# Altium PCB ValenFanControllerv01.PcbDoc
Units mm, origin at the board's own origin, x right, y up, seen from the top; angles counter-clockwise.
Board outline 175 x 100 mm, 2 copper layers (Top Layer, Bottom Layer); 106 components, 79 nets, 435 pads, 399 vias.
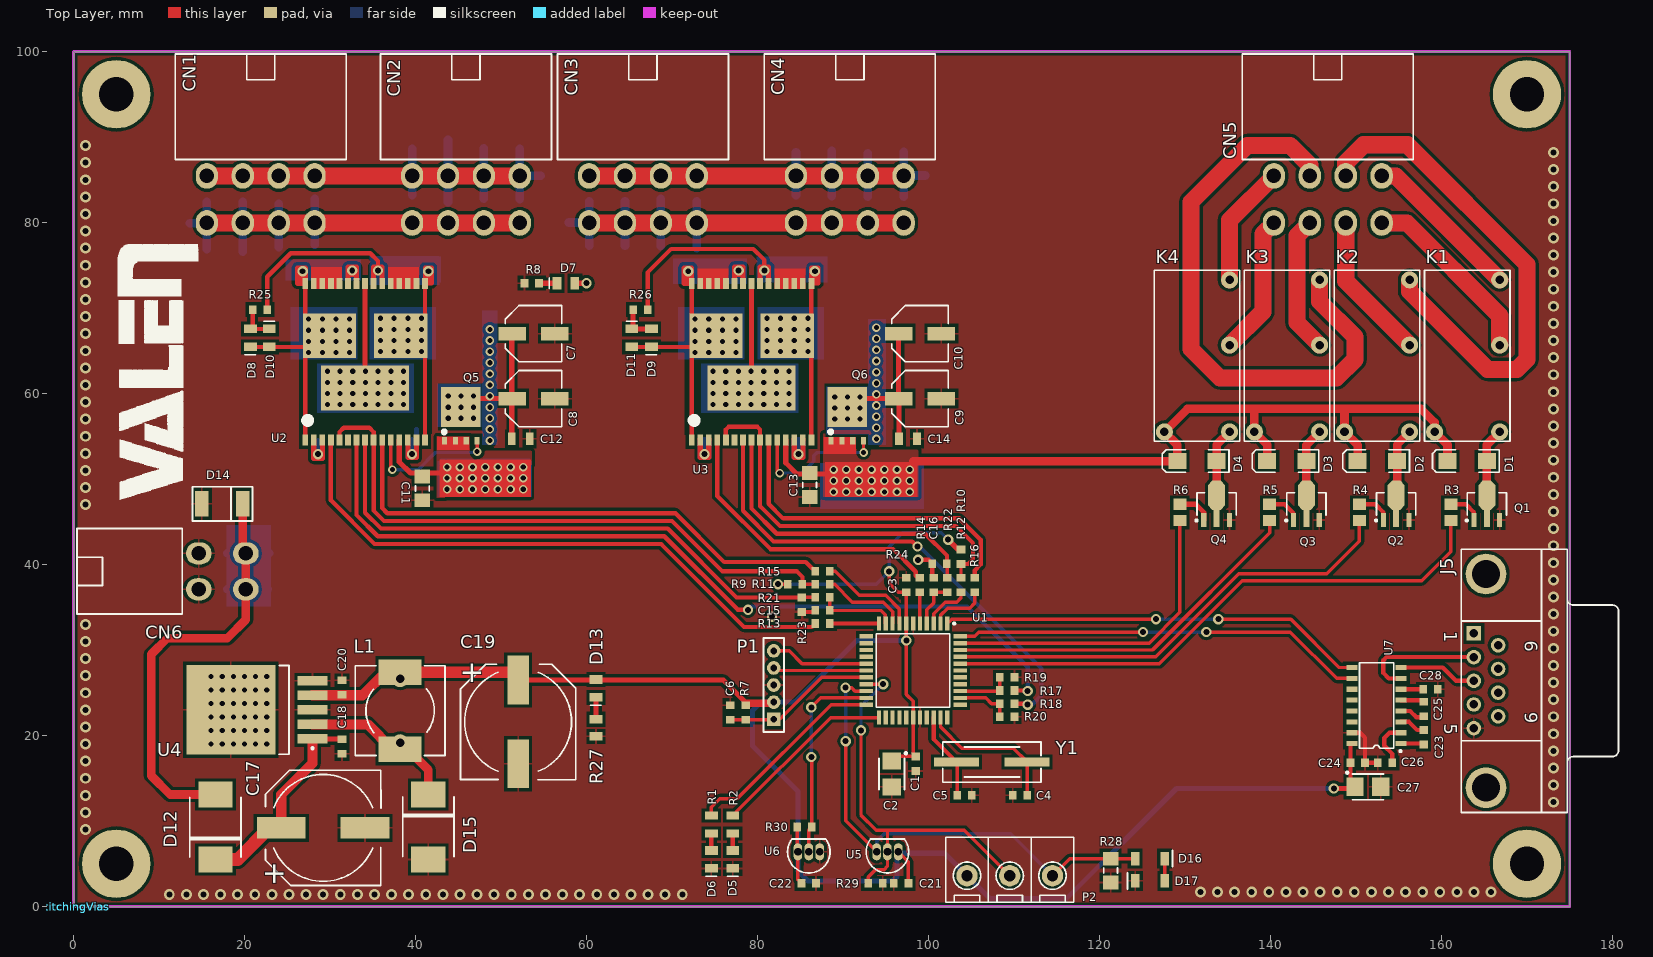
[diagram p0: Top Layer view]
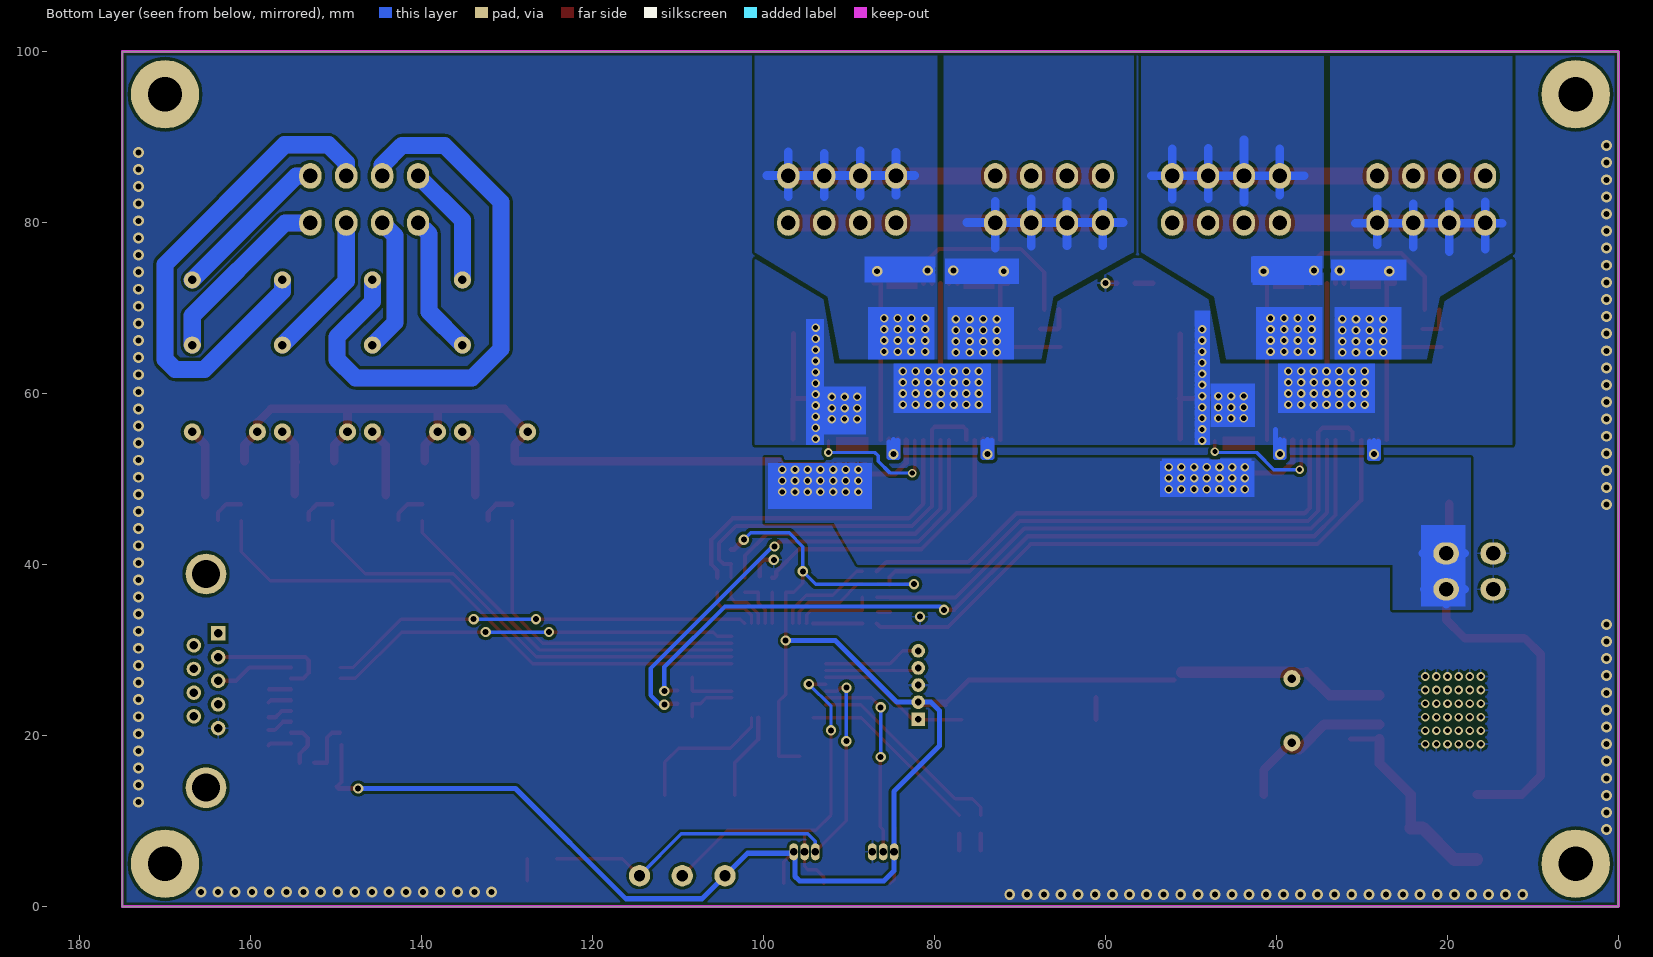
[diagram p1: Bottom Layer view, seen from below]
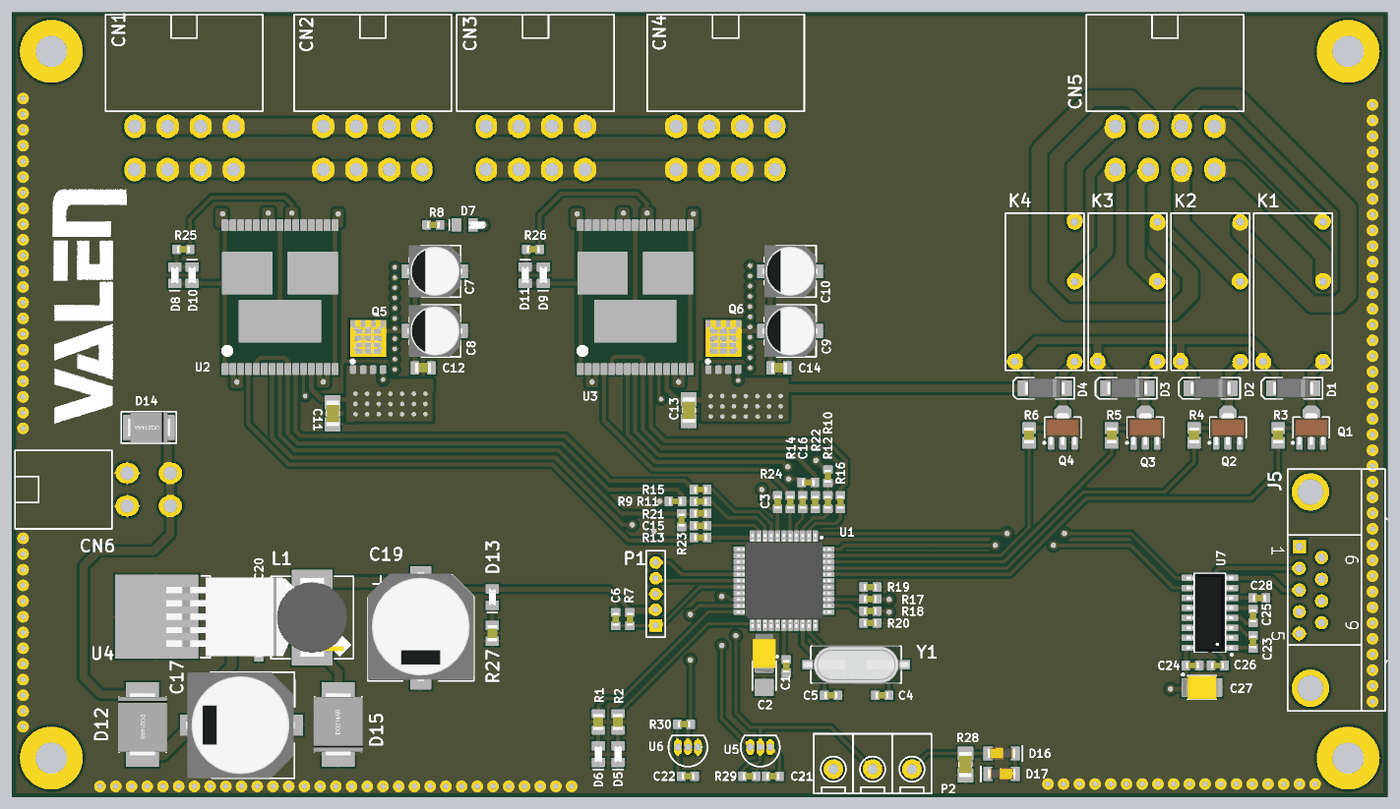
[diagram p2: 3D render of the assembled board from above, using the file's embedded part models]

## Layer stack, top to bottom
Top Layer: signal copper 0.0356
Dielectric: dielectric 0.32, FR-4, Dk 4.8
Bottom Layer: signal copper 0.0356

## Board outline
0,0 175,0 175,100 0,100

## Design rules (kind name [scope] priority, off if disabled: settings)
Clearance StitchingVias-Internal [InComponent('StitchingVias') vs InComponent('StitchingVias')] p1: gap=0.8 // Clearance between Stitching Vias
Clearance StitchingVias-Electrical [InComponent('StitchingVias') vs OnSignal] p2: gap=0.5 // Clearance between Stitching Vias and Electrical Objects
Clearance StitchingVias-Board [InComponent('StitchingVias') vs OnLayer('Keep-Out Layer')] p3: gap=0.5 // Clearance between Stitching Vias and Board Outline
Clearance [All] p4: gap=0.3
ComponentClearance StitchingVias-Comp [InComponent('StitchingVias')] p1: gap=0 collisioncheckmode=3 verticalgap=0 showdistances=FALSE // Clearance between "StitchingVias" Component and other Components
ComponentClearance [All] p2: gap=0.254 collisioncheckmode=3 verticalgap=0.254 showdistances=FALSE
HoleToHoleClearance [All] p1: gap=0.1 allowstackedmicrovias=TRUE
MinimumSolderMaskSliver [All] p1: minsoldermaskwidth=0.1
PasteMaskExpansion [All] p1: expansion=0.1
PlaneConnect StitchingVias-Plane [InComponent('StitchingVias')] p1: planeconnectstyle=Direct reliefexpansion=0.508 reliefentries=4 reliefconductorwidth=0.254 reliefairgap=0.254 // Power plane connect style rule for Stitching Vias
PlaneConnect [All] p2: planeconnectstyle=Relief reliefexpansion=0.508 reliefentries=4 reliefconductorwidth=0.3 reliefairgap=0.254
PolygonConnect StitchingVias-Poly [InComponent('StitchingVias')] p1: connectstyle=Direct reliefconductorwidth=0.254 reliefentries=4 polygonreliefangle="90 Angle" // Polygon connect style rule for Stitching Vias
PolygonConnect [All] p2: connectstyle=Relief reliefconductorwidth=0.254 reliefentries=4 polygonreliefangle="90 Angle"
RoutingVias StitchingVias-ViaStyle [InComponent('StitchingVias')] p1: holewidth=1 width=2 viastyle="Through Hole" minholewidth=1 minwidth=2 maxholewidth=1 maxwidth=2 // Via style rule for Stitching Vias
RoutingVias [All] p2: holewidth=0.6 width=1 viastyle="Through Hole" minholewidth=0.6 minwidth=0.8 maxholewidth=1.2 maxwidth=2
SilkscreenOverComponentPads [All] p1: minsilkscreentomaskgap=0.05
SolderMaskExpansion [All] p1: expansion=0.1
TestPointUsage [All] p1: valid=0 allowmultiple=FALSE
Testpoint [All] p1: side=15 testpointundercomponent=TRUE minsize=1.016 maxsize=2.54 preferedsize=1.524 minholesize=0 maxholesize=1.016 preferedholesize=0.813 testpointgrid=0.025 style=1023 order=0123456789
Width [All] p1: maxlimit=5 minlimit=0.3 preferedwidth=0.3
18 further rules are at their usual default settings.

## Classes and differential pairs
component class USART: C23 C24 C25 C26 C27 C28 J5 U7
component class MotorController: C7 C8 C9 C10 C11 C12 C13 C14 C15 C16 D7 D8 D9 D10 D11 Q5 Q6 R8 R9 R10 R11 R12 R13 R14 R15 R16 R17 R18 R19 R20 R21 R22 R23 R24 R25 R26 U2 U3
component class Sensor: C21 C22 D16 D17 P2 R28 R29 R30 U5 U6
component class POWER: C17 C18 C19 C20 D12 D13 D14 D15 L1 R27 U4
component class Main: C1 C2 C3 C4 C5 C6 P1 R7 U1 Y1
component class IO: D1 D2 D3 D4 D5 D6 D18 D19 K1 K2 K3 K4 K5 K6 K7 K8 K9 K10 K11 K12 K13 Q1 Q2 Q3 Q4 Q7 Q8 Q9 Q10 Q11 Q12 Q13 R1 R2 R3 R4 R5 R6
component class Connectors: CN1 CN2 CN3 CN4 CN5 CN6 CN7

## Components (designator, comment, footprint, x,y, rotation, side; value= is the part's Value field where it differs from the comment)
C1 "Cap" 3-0603_L 98.5,16.7 r90 top
C2 "CAP-Tantal" 3528 95.7,15.5 r270 top
C3 "Cap" 3-0603_L 97.4,37.6 r270 top
C4 "Cap" 3-0603_L 110.7,13 r0 top
C5 "Cap" 3-0603_L 104.2,13 r180 top
C6 "Cap" 3-0603_L 76.8,22.7 r270 top
C7 "Cap Pol1" "CAP D Size" 53.8,67 r90 top
C8 "Cap Pol1" "CAP D Size" 53.8,59.4 r90 top
C9 "Cap Pol1" "CAP D Size" 99,59.4 r90 top
C10 "Cap Pol1" "CAP D Size" 99,67 r90 top
C11 "Cap" 8-1206 40.8,48.9 r90 top
C12 "Cap" "6-0805 - big" 52.3,54.7 r180 top
C13 "Cap" 8-1206 86.1,49.3 r90 top
C14 "Cap" "6-0805 - big" 97.6,54.7 r180 top
C15 "Cap" 3-0603_L 87.6,34.625 r0 top
C16 "Cap" 3-0603_L 100.6,37.6 r270 top
C17 "Cap Pol1" "CAP Size H13= 12.5x13.8mm" 29.2,9.2 r90 top
C18 "Cap" 3-0603_L 31.4,18.7 r90 top
C19 "Cap Pol1" "CAP Size H13= 12.5x13.8mm" 52,21.6 r0 top
C20 "Cap" 3-0603_L 31.4,25.6 r270 top
C21 "Cap" 3-0603_L 96.8,2.7 r0 top
C22 "Cap" 3-0603_L 86,2.7 r180 top
C23 "Cap" 3-0603_L 157.9,19.8 r90 top
C24 "Cap" 3-0603_L 150.2,16.8 r180 top
C25 "Cap" 3-0603_L 157.9,23.1 r90 top
C26 "Cap" 3-0603_L 153.4,16.8 r180 top
C27 "CAP-Tantal" 3528 151.4,14 r0 top
C28 "Cap" 3-0603_L 158.7,25.4 r0 top
CN1 "Connector 4973-08TRNLF" "Connector 4973-08TRNLF" 21.9,82.7 r180 top
CN2 "Connector 4973-08TRNLF" "Connector 4973-08TRNLF" 45.9,82.7 r180 top
CN3 "Connector 4973-08TRNLF" "Connector 4973-08TRNLF" 66.6,82.7 r180 top
CN4 "Connector 4973-08TRNLF" "Connector 4973-08TRNLF" 90.8,82.7 r180 top
CN5 "Connector 4973-08TRNLF" "Connector 4973-08TRNLF" 146.7,82.7 r180 top
CN6 "Connector 4973-04TRNLF" "Connector 4973-04TRNLF" 17.4,39.2 r270 top
D1 "Diode 1N4007" DO214 163,52.1 r180 top
D2 "Diode 1N4007" DO214 152.5,52.1 r180 top
D3 "Diode 1N4007" DO214 141.9,52.1 r180 top
D4 "Diode 1N4007" DO214 131.4,52.1 r180 top
D5 "Yeşil Led" "6-0805 - LED" 77.1,5.5 r270 top
D6 "Kırmızı Led" "6-0805 - LED" 74.6,5.5 r270 top
D7 "LED" "6-0805 - LED" 57.6,72.9 r180 top
D8 "LED" "6-0805 - LED" 20.7,66.5 r270 top
D9 "LED" "6-0805 - LED" 67.6,66.5 r270 top
D10 "LED" "6-0805 - LED" 22.9,66.5 r90 top
D11 "LED" "6-0805 - LED" 65.3,66.5 r90 top
D12 "MBRS340T3G" "CASE 403-03 ISSUE E" 16.6,9.3 r270 top
D13 "LED" "6-0805 - LED" 61.1,25.5 r270 top
D14 "TVS SMAJ48CA" "DO214 AA" 17.4,47.1 r0 top
D15 "MBRS340T3G" "CASE 403-03 ISSUE E" 41.5,9.3 r90 top
D16 "LL4148" "DL-35 - S" 125.9,5.6 r0 top
D17 "LL4148" "DL-35 - S" 125.915,3 r180 top
J5 "D Connector 9" DSUB1.385-2H9 174.7,26.4 r270 top
K1 "Relay SRS" "RELAY ALQ324" 163,64.4 r0 top
K2 "Relay SRS" "RELAY ALQ324" 152.467,64.4 r0 top
K3 "Relay SRS" "RELAY ALQ324" 141.933,64.4 r0 top
K4 "Relay SRS" "RELAY ALQ324" 131.4,64.4 r0 top
L1 "Inductor" EB-221M18G01 38.2,22.9 r180 top
P1 "Header 2mm 5pin" "Header 2mm 5Pin" 81.9,21.9 r90 top
P2 "Connector DG301-5.0 - 3P" "Connector DG301-5.0 - 3P" 107,4.3 r0 top
Q1 "BCX56-16" SOT89M 165.3,47.1 r90 top
Q2 "BCX56-16" SOT89M 154.7,47.1 r90 top
Q3 "BCX56-16" SOT89M 144.2,47.1 r90 top
Q4 "BCX56-16" SOT89M 133.7,47.1 r90 top
Q5 "AON6508" "DFN5x6 EP" 45.3,57.4 r0 top
Q6 "AON6508" "DFN5x6 EP" 90.5,57.4 r0 top
R1 "Res1" "6-0805 - big" 74.6,9.6 r90 top
R2 "Res1" "6-0805 - big" 77.1,9.6 r90 top
R3 "Res1" 6-0805 161.1,46.1 r90 top
R4 "Res1" 6-0805 150.4,46.1 r90 top
R5 "Res1" 6-0805 139.9,46.1 r90 top
R6 "Res1" 6-0805 129.4,46.1 r90 top
R7 "Res1" 3-0603_L 78.6,22.7 r90 top
R8 "Res1" 3-0603_L 53.6,72.9 r0 top
R9 "Res1" 3-0603_L 84.4,37.7 r180 top
R10 "Res1" 3-0603_L 103.8,40.9 r90 top
R11 "Res1" 3-0603_L 87.6,37.675 r180 top
R12 "Res1" 3-0603_L 103.8,37.6 r90 top
R13 "Res1" 3-0603_L 87.6,33.1 r180 top
R14 "Res1" 3-0603_L 99,37.6 r90 top
R15 "Res1" 3-0603_L 87.6,39.2 r180 top
R16 "Res1" 3-0603_L 105.4,37.6 r90 top
R17 "Res1" 3-0603_L 109.2,25.267 r0 top
R18 "Res1" 3-0603_L 109.2,23.733 r0 top
R19 "Res1" 3-0603_L 109.2,26.8 r180 top
R20 "Res1" 3-0603_L 109.2,22.2 r180 top
R21 "Res1" 3-0603_L 87.6,36.15 r0 top
R22 "Res1" 3-0603_L 102.2,37.6 r270 top
R23 "Res1" 3-0603_L 85.2,35.3 r90 top
R24 "Res1" 3-0603_L 101.3,40.1 r0 top
R25 "Res1" 3-0603_L 21.8,69.8 r180 top
R26 "Res1" 3-0603_L 66.3,69.8 r180 top
R27 "Res1" 6-0805_M 61.1,20.9 r90 top
R28 "Res1" 8-1206 121.3,4.2 r90 top
R29 "Res1" 3-0603_L 93.8,2.7 r180 top
R30 "Res1" 3-0603_L 85.5,9.3 r180 top
StitchingVias "Component That Holds Stitching Vias" ? 0,0 r0 top locked
StitchingVias "Component That Holds Stitching Vias" ? 0,0 r0 top locked
StitchingVias "Component That Holds Stitching Vias" ? 0,0 r0 top locked
U1 "PIC16F887" TQFP-44 98.2,27.6 r270 top
U2 "VNH5019A-E" MultiPowerSO-30 34.1,63.7 r0 top
U3 "VNH5019A-E" MultiPowerSO-30 79.3,63.7 r0 top
U4 "LM2576S-5.0" TS5B_M 21.9,23 r180 top
U5 "LM35DZ" TO-92 95.2,6.4 r90 top
U6 "DS18B20" TO-92 86,6.4 r90 top
U7 "MAX232ID" "SOIC16 - big" 152.4,23.5 r90 top
Y1 "XTAL_SMT" "XTAL - SMT" 107.4,16.9 r0 top

## Footprints (in the part's own frame and the unit in brackets; to place one, negate y for a bottom-side part, rotate by r counter-clockwise, add the part's x,y. Pads: shape width x height; smd on the part's side, far side on the other; paste and mask are expansions set on the pad)
3-0603_L [mm] "Chip Resistor; Body 1.6 x 0.9 mm (LxW typ)"
  rect 0.9x1 smd: 1(-0.85,0) 2(0.85,0)
  body extent -0.81,-0.41 0.81,0.41, height 0.46
6-0805 [mm] "Chip Resistor; Body 2 x 1.2 mm (LxW typ)"
  rect 1.3x1.5 smd: 1(-0.95,0) 2(0.95,0)
  body extent -1.01,-0.63 1.01,0.64, height 0.61
"6-0805 - big" [mm] "Chip Resistor; Body 2 x 1.2 mm (LxW typ)"
  rect 0.9x1.5 smd: 1(-1.05,0) 2(1.05,0)
  body extent -1.01,-0.63 1.01,0.64, height 0.61
"6-0805 - LED" [mm] "Chip LED"
  rect 1x1.5 smd: 1(-1.05,0) 2(1.05,0)
  silkscreen extent 1.96,-0.63 1.96,0.62, body extent -1.03,-0.45 1.03,0.46, height 0.85
6-0805_M [mm] "Chip Resistor; Body 2 x 1.2 mm (LxW typ)"
  rect 1x1.5 smd: 1(-1,0) 2(1,0)
  body extent -1.01,-0.63 1.01,0.64, height 0.61
8-1206 [mm] "Chip Resistor; Body 3.1 x 1.6 mm (LxW typ)"
  rect 1.6x1.8 smd: 1(-1.4,0) 2(1.4,0)
  silkscreen extent -0.3,-0.8 0.3,0.8, body extent -1.61,-0.81 1.61,0.81, height 0.61
3528 [mm] "Capacitor, SM Tantalum; Body 3.5 x 2.8 mm (LxW typ)"
  rect 2x2.2 smd: 1(-1.5,0) 2(1.5,0)
  silkscreen extent -2.55,-1.5 1.85,1.78, body extent -2.5,-1.5 2.5,1.5, height 2.11
"CAP D Size" [mm]
  rect 1.6x3.2 smd: 1(0,2.5) 2(0,-2.5)
  silkscreen extent -3.3,-3.3 3.3,3.3, body extent -3.3,-3.5 3.3,3.5, height 7.71
"CAP Size H13= 12.5x13.8mm" [mm]
  rect 2.5x5.7 smd: 1(0,4.9) 2(0,-4.9)
  silkscreen extent -6.75,-6.76 6.75,6.75, body extent -6.75,-6.76 6.75,7.04, height 13.5
"CASE 403-03 ISSUE E" [mm] "CASE 403-03 ISSUE E"
  rect 3x4 smd: 1(-3.8,0) 2(3.8,0)
  silkscreen extent -3.48,-3 3.53,3, body extent -4.06,-3.14 4.06,3.16, height 2.67
"Connector 4973-04TRNLF" [mm]
  oval 2.6x3 hole 1.7: 1(-2.1,-2.75) 2(-2.1,2.75) 3(2.1,-2.75) 4(2.1,2.75)
  silkscreen extent -5,-17 5,-4.67
"Connector 4973-08TRNLF" [mm]
  oval 2.6x3 hole 1.7: 1(-6.3,-2.75) 2(-6.3,2.75) 3(-2.1,-2.75) 4(-2.1,2.75) 5(2.1,-2.75) 6(2.1,2.75) 7(6.3,-2.75) 8(6.3,2.75)
  silkscreen extent -10,-17 10,-4.67
"Connector DG301-5.0 - 3P" [mm]
  round 2.5 hole 1.3: 1(-2.5,-0.7) 2(2.5,-0.7) 3(7.5,-0.7)
  silkscreen extent -5,-3.8 10,3.8
"DFN5x6 EP" [mm]
  rect 0.6x0.9 smd mask+0.075: 1(-1.905,-2.925) 2(-0.635,-2.925) 3(0.635,-2.925) 4(1.905,-2.925)
  rect 0.9x0.6 on Top Paste mask+0: 5(-1.15,-0.625) 5(-1.15,0.225) 5(-1.15,1.075) 5(-1.15,1.925) 5(0,-0.625) 5(0,0.225) 5(0,1.075) 5(0,1.925) 5(1.15,-0.625) 5(1.15,0.225) 5(1.15,1.075) 5(1.15,1.925)
  rect 4.6x4.7 smd paste-4 mask+0.075: 5(0,1.03)
  rect 0.6x0.9 on Top Paste mask+0: 5(1.905,2.925) 6(0.635,2.925) 7(-0.635,2.925) 8(-1.905,2.925)
  silkscreen extent -2.05,-1.99 -1.85,-1.79
"DL-35 - S" [mm]
  rect 1x1.6 smd: 1(-1.725,0) 2(1.725,0)
  silkscreen extent 2.64,-0.95 2.64,0.98, body extent -1.76,-0.75 1.74,0.75, height 1.5
DO214 [mm] "DO-214-AC/SMA; 2 C-Bend Leads; Body 5.3 x 2.6 mm, inc. leads (LxW)"
  rect 2.1x1.85 smd: 1(-2.3,0) 2(2.3,0)
  silkscreen extent -3.75,-1.33 4.05,1.33, body extent -2.6,-1.3 2.6,1.3, height 2.4
"DO214 AA" [mm] "DO-214-AA/SMB; 2 C-Bend Leads; Body 5.6 x 3.9 mm, inc. leads (LxW)"
  rect 1.6x3 smd: 1(-2.4,0) 2(2.4,0)
  silkscreen extent -3.48,-2 3.53,2, body extent -2.76,-1.95 2.82,2, height 2.65
DSUB1.385-2H9 [mm] "Connector; D Subminiature; 9 Position; Right Angle; Pitch 1.385 mm"
  rect 1.69x1.69 hole 1: 1(-5.54,-10.92)
  round 1.69 hole 1: 2(-2.77,-10.92) 3(0,-10.92) 4(2.77,-10.92) 5(5.54,-10.92) 6(-4.155,-8.08) 7(-1.385,-8.08) 8(1.385,-8.08) 9(4.155,-8.08)
  round 4.76 hole 3.26: 10(-12.495,-9.5) 11(12.495,-9.5)
  silkscreen extent -15.4,-12.4 15.4,6
EB-221M18G01 [mm]
  rect 5x3 smd: 1(0,4.5) 2(0,-4.5)
  round 2 hole 1: 1(0,3.75) 2(0,-3.75)
  silkscreen extent -5.25,-5.25 5.25,5.25, body extent -5,-5.02 5,4.98, height 4.7
"Header 2mm 5Pin" [mm] "10 pin header"
  rect 1.6x1.6 hole 0.8: 1(0,0)
  round 1.6 hole 0.8: 2(2,0) 3(4,0) 4(6,0) 5(8,0)
  silkscreen extent -1.5,-1.2 9.5,1.2
MultiPowerSO-30 [mm]
  rect 0.68x1.3 smd: 1(-7,-9.15) 2(-6,-9.15) 3(-5,-9.15) 4(-4,-9.15) 5(-3,-9.15) 6(-2,-9.15) 7(-1,-9.15) 8(0,-9.15) 9(1,-9.15) 10(2,-9.15) 11(3,-9.15) 12(4,-9.15) 13(5,-9.15) 14(6,-9.15) 15(7,-9.15) 16(7,9.15) 17(6,9.15) 18(5,9.15) 19(4,9.15) 20(3,9.15) 21(2,9.15) 22(1,9.15) 23(0,9.15) 24(-1,9.15) 25(-2,9.15) 26(-3,9.15) 27(-4,9.15) 28(-5,9.15) 29(-6,9.15) 30(-7,9.15)
  rect 10.3x5.25 smd: 31(0,-3.05)
  rect 6.23x5.25 smd: 32(4.165,3.05) 33(-4.165,3.05)
  silkscreen extent -6.97,-7.1 -6.46,-6.58
"RELAY ALQ324" [mm] "24V - 5A Relay"
  round 2 hole 1: 1(3.81,8.89) 2(3.81,1.27) 3(-3.81,-8.89) 4(3.81,-8.89)
  silkscreen extent -5,-10 5,10, body extent -4.99,-9.99 5,9.98, height 15.6
"SOIC16 - big" [mm]
  rect 0.6x1.3 smd: 1(-4.445,-2.875) 2(-3.175,-2.875) 3(-1.905,-2.875) 4(-0.635,-2.875) 5(0.635,-2.875) 6(1.905,-2.875) 7(3.175,-2.875) 8(4.445,-2.875) 9(4.45,2.875) 10(3.175,2.875) 11(1.905,2.875) 12(0.635,2.875) 13(-0.635,2.875) 14(-1.905,2.875) 15(-3.175,2.875) 16(-4.445,2.875)
  silkscreen extent -5.45,-2.93 5,2, body extent -5,-2.95 4.98,2.95, height 1.45
SOT89M [mm] "SOT89, 3-Leads, Body 4.5x2.4 mm, Pitch 1.5mm, Lead Span 4.1mm, IPC Low Density"
  rect 1.6x0.6 smd: 1(-1.9,1.5) 3(-1.9,-1.5)
  rect 2x0.7 smd: 2(-1.7,0)
  oct 3.4x2 smd: 2(1,0)
  silkscreen extent -2.07,-2.3 1.3,2.47, body extent -2.18,-2.3 1.82,2.3, height 1.6
TO-92 [mm]
  oval 2x1 hole 0.9: 1(0,-1.27) 2(0,0) 3(0,1.27)
  silkscreen extent -2.48,-2.48 1.5,2.48
TQFP-44 [mm]
  rect 1.6x0.5 smd: 1(-5.5,4) 2(-5.5,3.2) 3(-5.5,2.4) 4(-5.5,1.6) 5(-5.5,0.8) 6(-5.5,0) 7(-5.5,-0.8) 8(-5.5,-1.6) 9(-5.5,-2.4) 10(-5.5,-3.2) 11(-5.5,-4) 23(5.5,-4) 24(5.5,-3.2) 25(5.5,-2.4) 26(5.5,-1.6) 27(5.5,-0.8) 28(5.5,0) 29(5.5,0.8) 30(5.5,1.6) 31(5.5,2.4) 32(5.5,3.2) 33(5.5,4)
  rect 0.5x1.6 smd: 12(-4,-5.5) 13(-3.2,-5.5) 14(-2.4,-5.5) 15(-1.6,-5.5) 16(-0.8,-5.5) 17(0,-5.5) 18(0.8,-5.5) 19(1.6,-5.5) 20(2.4,-5.5) 21(3.2,-5.5) 22(4,-5.5) 34(4,5.5) 35(3.2,5.5) 36(2.4,5.5) 37(1.6,5.5) 38(0.8,5.5) 39(0,5.5) 40(-0.8,5.5) 41(-1.6,5.5) 42(-2.4,5.5) 43(-3.2,5.5) 44(-4,5.5)
  silkscreen extent -5.62,-4.3 4.3,4.93, body extent -6,-6 6,6, height 1.1
TS5B_M [mm] "D2-PAK, 6-Leads, Body 8.6x10.2mm, Pitch 1.7mm, Lead Span 14.1mm, IPC Low Density"
  rect 3.5x1.1 smd: 1(-6.05,3.4) 2(-6.05,1.7) 3(-6.05,0) 4(-6.05,-1.7) 5(-6.05,-3.4)
  rect 10.4x10.5 smd: 6(3.5,0)
  silkscreen extent -6.18,-5.2 -2.11,5.2, body extent -7.73,-5 7.94,5, height 4.78
"XTAL - SMT" [mm]
  rect 5.25x1 smd: 1(-4.125,0) 2(4.125,0)
  silkscreen extent -5.75,-2.35 5.75,2.35, body extent -6.7,-2.45 6.7,2.45, height 5.08
? [mm]

## Part data
C1 C3 C4 C5 C6 C11 C12 C13 C14 C15 C16 C18 C20 C21 C22 C23 C24 C25 C26 C28: "Capacitor"
C2 C27: "Tantamount Military, Surface Mount MIL-PRF-55365/8 Qualified Solid Tantalum Chip Capacitor: 6.8uF, 20% Tolerance, 6 WVDC @ +85°C, Surge = 8V"
C7 C8 C9 C10 C17 C19: "Polarized Capacitor (Radial)"
CN1 CN2 CN3 CN4 CN5: "Connector 8-Pin, 90 degree, 3.5mm"
CN6: "Connector 4-Pin, 90 degree, 3.5mm"
D1 D2 D3 D4 D16 D17: "1 Amp General Purpose Rectifier"
D5 D6: library part LED, "Typical INFRARED GaAs LED"
D7 D8 D9 D10 D11 D13: "Typical INFRARED GaAs LED"
D12 D15: "3 Amp Shotky Rectifier"
J5: "Receptacle Assembly, 9 Position, Right Angle"
K1 K2 K3 K4: library part "Relay ALQ324", "Relay ALQ324"
P1: "Header 2mm , 5-Pin"
P2: "Connector, 3-Pin"
Q1 Q2 Q3 Q4: "NPN General-purpose Transistor"
Q5 Q6: "30V N-Channel AlphaMOS"
R1 R2 R3 R4 R5 R6 R7 R8 R9 R10 R11 R12 R13 R14 R15 R16 R17 R18 R19 R20 R21 R22 R23 R24 R25 R26 R27 R28 R29 R30: "Resistor"
U1: "EPROM-Based 8-Bit CMOS Microcontroller"
U2 U3: "Automotive fully integrated H-bridge motor driver"
U4: "SIMPLE SWITCHER; 3A Step-Down Voltage Regulator"
U5: "Temperature Sensor"
U6: "1-Wire Temperature Sensor"
U7: "5V, Low-Power, up to 1Mbps, True RS-232 Transceiver Using Four 0.1µF External Capacitor"
Y1: "Crystal Oscillator"

## Free pads (board coordinates)
  round 8 hole 4: 0(5,5) 0(5,95) 0(170,5) 0(170,95)

## Via types
v1: diameter 1, hole 0.6, Top Layer to Bottom Layer, tented bottom, 174 vias
v2: diameter 1.27, hole 0.7, Top Layer to Bottom Layer, 123 vias
v3: diameter 1, hole 0.6, Top Layer to Bottom Layer, tented both sides, 68 vias
v4: diameter 1.2, hole 0.7, Top Layer to Bottom Layer, tented both sides, 34 vias

## Nets (pads, with @x,y where several pads share a name; then routed paths per layer and width w, separated by ;. In a path a pad name is that pad's centre, name@x,y a point inside that pad or via, vN(x,y) a via of type N, cw(c..) or ccw(c..) an arc to the next point about the centre after c; other vN are vias at no path point)
GND: C1.1 C2.2 C3.1 C4.1 C5.1 C6.1 C7.2 C8.2 C9.2 C10.2 C11.1 C12.1 C13.1 C14.1 C15.1 C16.1 C17.2 C18.1 C19.2 C20.1 C21.1 C22.1 C24.1 C26.2 C27.2 C28.2 CN6.1 CN6.3 D5.2 D6.2 D14.1 D15.1 D17.2 J5.5 P1.3 Q1.3 Q2.3 Q3.3 Q4.3 R8.1 R19.1 R20.1 R23.1 R24.1 R27.1 R28.1 R29.1 U1.6 U1.29 U2.17 U2.18 U2.19 U2.20 U2.26 U2.27 U2.28 U2.29 U3.17 U3.18 U3.19 U3.20 U3.26 U3.27 U3.28 U3.29 U4.3 U4.5 U4.6 U6.1 U7.15 | length 10.9
  Top Layer w0.5: R23.1 C15.1@86.575,34.45 ; v4(98.796,40.55) 100,40.55 R24.1 C16.1@100.45,38.6 ; U7.15 150.475,20.325 151.05,19.75 C24.1 C26.2
  other v1: 16.1,19 17.4,19 18.7,19 20,19 21.3,19 22.6,19 16.1,20.58 17.4,20.58 18.7,20.58 20,20.58 21.3,20.58 22.6,20.58 16.1,22.16 17.4,22.16 18.7,22.16 20,22.16 21.3,22.16 22.6,22.16 16.1,23.74 17.4,23.74 18.7,23.74 20,23.74 21.3,23.74 22.6,23.74 16.1,25.32 17.4,25.32 18.7,25.32 20,25.32 21.3,25.32 22.6,25.32 16.1,26.9 17.4,26.9 18.7,26.9 20,26.9 21.3,26.9 22.6,26.9
  other v2: 11.2,1.4 13.2,1.4 15.2,1.4 17.2,1.4 19.2,1.4 21.2,1.4 23.2,1.4 25.2,1.4 27.2,1.4 29.2,1.4 31.2,1.4 33.2,1.4 35.2,1.4 37.2,1.4 39.2,1.4 41.2,1.4 43.2,1.4 45.2,1.4 47.2,1.4 49.2,1.4 51.2,1.4 53.2,1.4 55.2,1.4 57.2,1.4 59.2,1.4 61.2,1.4 63.2,1.4 65.2,1.4 67.2,1.4 69.2,1.4 71.2,1.4 131.8,1.7 133.8,1.7 135.8,1.7 137.8,1.7 139.8,1.7 141.8,1.7 143.8,1.7 145.8,1.7 147.8,1.7 149.8,1.7 151.8,1.7 153.8,1.7 155.8,1.7 157.8,1.7 159.8,1.7 161.8,1.7 163.8,1.7 165.8,1.7 1.4,9 1.4,11 173.1,12.2 1.4,13 173.1,14.2 1.4,15 173.1,16.2 1.4,17 173.1,18.2 1.4,19 173.1,20.2 1.4,21 173.1,22.2 1.4,23 173.1,24.2 1.4,25 173.1,26.2 1.4,27 173.1,28.2 1.4,29 173.1,30.2 1.4,31 173.1,32.2 1.4,33 173.1,34.2 173.1,36.2 173.1,38.2 173.1,40.2 173.1,42.2 173.1,44.2 173.1,46.2 1.4,47 173.1,48.2 1.4,49 173.1,50.2 1.4,51 173.1,52.2 1.4,53 173.1,54.2 1.4,55 173.1,56.2 1.4,57 173.1,58.2 1.4,59 173.1,60.2 1.4,61 173.1,62.2 1.4,63 173.1,64.2 1.4,65 173.1,66.2 1.4,67 173.1,68.2 1.4,69 173.1,70.2 1.4,71 173.1,72.2 1.4,73 173.1,74.2 1.4,75 173.1,76.2 1.4,77 173.1,78.2 1.4,79 173.1,80.2 1.4,81 173.1,82.2 1.4,83 173.1,84.2 1.4,85 173.1,86.2 1.4,87 173.1,88.2 1.4,89
  other v4: 81.7,33.9
NetC4_2: C4.2 U1.32 Y1.2 | length 16.9
  Top Layer w0.4: U1.32 101.4,21 103.9,18.5 109.925,18.5 Y1.2 111.55,16.875 C4.2 C4.2@111.525,13.025
NetC5_2: C5.2 U1.31 Y1.1 | length 10.1
  Top Layer w0.4: C5.2 Y1.1@103.35,16.825
  Top Layer w0.5: U1.31 100.6,19.575 Y1.1
NetC6_2: C6.2 P1.1 R7.1 U1.18 | length 17.9
  Top Layer w0.4: C6.2 P1.1@81.85,21.85 ; P1.1 82.6,21.9 87.5,26.8 U1.18
NetC15_2: C15.2 R21.2 U1.10 | length 9.3
  Top Layer w0.4: R21.2 C15.2 94.432,34.625 94.95,34.107 94.95,33.15 U1.10
NetC16_2: C16.2 R22.2 U1.4 | length 5.6
  Top Layer w0.4: U1.4 99.8,34.7 100.6,35.5 C16.2 R22.2
NetC17_1: C17.1 C18.2 D12.2 U4.1 | length 24.5
  Top Layer w0.6: U4.1@28,19.6 C18.2@31.35,19.6
  Top Layer w1.2: C17.1 24.3,13.1 27.95,16.75 27.95,19.55 U4.1@28,19.6
  Top Layer w1.5: D12.2 19.2,5.5 22.9,9.2 C17.1
NetC23_1: C23.1 U7.1 | length 2.7
  Top Layer w0.5: U7.1 157.695,19.055 C23.1@157.9,18.85
NetC23_2: C23.2 U7.3 | length 3
  Top Layer w0.5: U7.3 156.205,21.595 157.15,20.65 C23.2
NetC25_1: C25.1 U7.4 | length 2.9
  Top Layer w0.5: U7.4 156.335,22.865 157.05,22.15 C25.1@157.9,22.15
NetC25_2: C25.2 U7.5 | length 2.7
  Top Layer w0.5: U7.5 157.615,24.135 C25.2@157.9,23.85
NetC26_1: C26.1 U7.2 | length 5.5
  Top Layer w0.5: C26.1 154.25,17.85 153.3,18.8 153.3,19.7 153.925,20.325 U7.2
NetC28_1: C28.1 U7.6 | length 2.6
  Top Layer w0.5: U7.6 C28.1@157.845,25.405
NetCN1_1: CN1.1 CN1.3 CN1.5 CN1.7 CN2.1 CN2.3 CN2.5 CN2.7 R25.1 U2.15 U2.16 U2.21 U2.22 U2.32 | length 130.2
  Top Layer w0.5: R25.1 22.65,73.65 25.4,76.4 34.7,76.4 35.6,75.5 35.6,74.8 v4(35.6,74.4) v4@35.6,74.3 ; U2.15 U2.16 U2.16@41.1,72.9 ; v4@41.1,74.2 U2.16@41.1,72.9 ; v4@41.6,74.3 41.6,73.4 U2.16@41.1,72.9 ; U2.16@41.1,72.9 41.9,72.9 41.9,74.7 41.1,74.7 U2.16@41.1,72.9
  Top Layer w0.6: U2.22 35.1,74.8 35.6,74.8 36.1,74.8 U2.21
  Top Layer w2: CN1.7 CN1.5 ; CN1.5@19.5,85.45 CN1.5 ; CN2.1 CN2.3 CN2.5 CN2.7 CN1.1 CN1.3 CN1.5
  Bottom Layer w1: 36.75,85.45 CN2.7 ; 39.6,83.2 CN2.7 ; 39.6,88.6 CN2.7 ; 43.8,82.35 CN2.5 ; 43.8,89.7 CN2.5 ; 48,82.8 CN2.3 ; 48,88.7 CN2.3 ; 52.2,82.7 CN2.1 ; 52.2,88.6 CN2.1 ; 54.65,85.45 CN2.1 ; CN2.7 CN2.5 ; CN2.5 CN2.3 ; CN2.3 CN2.1
  other v1: 35.9,64.9 37.5,64.9 39.1,64.9 40.7,64.9 35.9,66.2 37.5,66.2 39.1,66.2 40.7,66.2 35.9,67.5 37.5,67.5 39.1,67.5 40.7,67.5 35.9,68.8 37.5,68.8 39.1,68.8 40.7,68.8
  other v4: 41.5,74.3
NetCN1_2: CN1.2 CN1.4 CN1.6 CN1.8 CN2.2 CN2.4 CN2.6 CN2.8 D8.2 D10.1 U2.1 U2.24 U2.25 U2.30 U2.33 | length 114.5
  Top Layer w0.5: D8.2 D10.1 U2.33@28.635,65.45 ; U2.1 U2.30
  Top Layer w0.6: v4@26.7,74.1 26.7,72.9 26.2,72.9 26.2,74.7 27.1,74.7 U2.30 ; U2.25 32.1,74.8 33.1,74.8 33.1,73.9 ; v4@32.6,74.3 32.2,73.9 33.1,73.9 ; U2.24 33.1,73.9
  Top Layer w2: CN1.8 CN1.6 CN1.4 CN1.2 CN2.8 CN2.6 CN2.4 CN2.2
  Bottom Layer w1: 13.6,79.9 19.8,79.9 30.8,79.9 ; 15.6,76.9 15.6,82.4 ; 19.8,76.6 19.8,82.4 ; 24,77.1 24,82.2 ; 28.2,77.4 28.2,82.8
  other v1: 27.5,64.8 29.1,64.8 30.7,64.8 32.3,64.8 27.5,66.1 29.1,66.1 30.7,66.1 32.3,66.1 27.5,67.4 29.1,67.4 30.7,67.4 32.3,67.4 27.5,68.7 29.1,68.7 30.7,68.7 32.3,68.7
  other v4: 26.8,74.3 32.6,74.4
NetCN3_1: CN3.1 CN3.3 CN3.5 CN3.7 CN4.1 CN4.3 CN4.5 CN4.7 R26.1 U3.15 U3.16 U3.21 U3.22 U3.32 | length 127.1
  Top Layer w0.5: R26.1 67.15,74.15 69.9,76.9 79.5,76.9 80.8,75.6 80.8,74.8 v4(80.8,74.4) v4@80.8,74.3 ; U3.15 U3.16 U3.16@86.3,72.9 ; v4@86.3,74.2 U3.16@86.3,72.9 ; v4@86.8,74.3 86.8,73.4 U3.16@86.3,72.9 ; U3.16@86.3,72.9 87.1,72.9 87.1,74.7 86.3,74.7 U3.16@86.3,72.9
  Top Layer w0.6: U3.22 80.3,74.8 80.8,74.8 81.3,74.8 81.3,74.4 U3.21
  Top Layer w2: CN3.7 CN3.5 CN3.3 CN3.1 CN4.7 CN4.5 CN4.3 CN4.1
  Bottom Layer w1: 82.3,85.5 88.7,85.5 99.6,85.5 ; 84.5,83.2 CN4.7 84.5,88.2 ; 88.7,83.1 CN4.5 88.7,88.4 ; 92.9,83 92.9,88.1 ; 97.1,83 97.1,88.3
  other v1: 81.1,64.9 82.7,64.9 84.3,64.9 85.9,64.9 81.1,66.2 82.7,66.2 84.3,66.2 85.9,66.2 81.1,67.5 82.7,67.5 84.3,67.5 85.9,67.5 81.1,68.8 82.7,68.8 84.3,68.8 85.9,68.8
  other v4: 86.7,74.3
NetCN3_2: CN3.2 CN3.4 CN3.6 CN3.8 CN4.2 CN4.4 CN4.6 CN4.8 D9.2 D11.1 U3.1 U3.24 U3.25 U3.30 U3.33 | length 116.1
  Top Layer w0.5: D11.1 D9.2 U3.33@73.835,65.45 ; U3.1 U3.30
  Top Layer w0.6: v4@71.9,74.1 71.9,72.9 71.4,72.9 71.4,74.7 72.3,74.7 U3.30 ; U3.25 77.3,74.8 78.3,74.8 78.3,73.9 ; v4@77.8,74.3 77.4,73.9 78.3,73.9 ; U3.24 78.3,73.9
  Top Layer w2: CN3.8 CN3.6 CN3.4 CN3.2 CN4.8 CN4.6 CN4.4 CN4.2
  Bottom Layer w1: 57.9,80 64.5,80 76.2,80 ; 60.3,77.3 60.3,82.5 ; 64.5,77.3 64.5,82.5 ; 68.7,77.2 68.7,82.8 ; 72.9,77 72.9,82.5
  other v1: 72.7,64.8 74.3,64.8 75.9,64.8 77.5,64.8 72.7,66.1 74.3,66.1 75.9,66.1 77.5,66.1 72.7,67.4 74.3,67.4 75.9,67.4 77.5,67.4 72.7,68.7 74.3,68.7 75.9,68.7 77.5,68.7
  other v4: 71.9,74.3 77.8,74.4
NetCN5_1: CN5.1 K1.1 | length 37.7
  Top Layer w2: CN5.1 154.65,85.45 K1.1
  Bottom Layer w2: CN5.1 154.65,85.45 K1.1
NetCN5_2: CN5.2 K1.2 | length 43.5
  Top Layer w2: CN5.2 155.95,79.95 166.81,69.09 K1.2
  Bottom Layer w2: CN5.2 155.95,79.95 166.81,69.09 K1.2
NetCN5_3: CN5.3 K2.1 | length 119.8
  Top Layer w2: CN5.3 148.8,87 150.9,89.1 156,89.1 170,75.1 170,64 168.8,62.8 165.4,62.8 156.277,71.923 K2.1
  Bottom Layer w2: CN5.3 148.8,87 150.9,89.1 156,89.1 170,75.1 170,64 168.8,62.8 165.4,62.8 156.277,71.923 K2.1
NetCN5_4: CN5.4 K2.2 | length 34.8
  Top Layer w2: CN5.4 148.8,73.147 K2.2
  Bottom Layer w2: CN5.4 148.8,73.147 K2.2
NetCN5_5: CN5.5 K3.1 | length 137.1
  Top Layer w2: CN5.5 144.6,86.7 142.3,89 137.3,89 130.7,82.4 130.7,65.2 134.1,61.8 147.7,61.8 149.9,64 149.9,66.6 145.743,70.757 K3.1
  Bottom Layer w2: CN5.5 144.6,86.7 142.3,89 137.3,89 130.7,82.4 130.7,65.2 134.1,61.8 147.7,61.8 149.9,64 149.9,66.6 145.743,70.757 K3.1
NetCN5_6: CN5.6 K3.2 | length 32
  Top Layer w2: CN5.6 143.1,78.45 143.1,68.313 K3.2
  Bottom Layer w2: CN5.6 143.1,78.45 143.1,68.313 K3.2
NetCN5_7: CN5.7 K4.1 | length 28.6
  Top Layer w2: K4.1 135.21,80.26 CN5.7
  Bottom Layer w2: K4.1 135.21,80.26 CN5.7
NetCN5_8: CN5.8 K4.2 | length 32.9
  Top Layer w2: K4.2 139.1,69.56 139.1,78.65 CN5.8
  Bottom Layer w2: K4.2 139.1,69.56 139.1,78.65 CN5.8
NetD1_1: D1.1 K1.4 Q1.2 | length 8
  Top Layer w1: Q1.2@165.3,48.1 D1.1 165.3,54 K1.4
NetD2_1: D2.1 K2.4 Q2.2 | length 8.1
  Top Layer w1: D2.1@154.7,52 D2.1 ; Q2.2@154.8,48.2 D2.1 ; K2.4 154.8,54.033 D2.1
NetD3_1: D3.1 K3.4 Q3.2 | length 8
  Top Layer w1: Q3.2@144.2,48.1 D3.1 144.2,53.967 K3.4
NetD4_1: D4.1 K4.4 Q4.2 | length 8
  Top Layer w1: Q4.2@133.7,48.1 D4.1 133.7,54 K4.4
NetD5_1: D5.1 R2.1 | length 2
  Top Layer w0.5: D5.1 R2.1
NetD6_1: D6.1 R1.1 | length 2
  Top Layer w0.5: D6.1 R1.1
NetD7_2: D7.2 R8.2 | length 2.1
  Top Layer w0.6: R8.2 D7.2
NetD8_1: D8.1 D10.2 R25.2 | length 4.2
  Top Layer w0.5: D8.1 D10.2 ; D8.1@20.95,67.8 R25.2
NetD9_1: D9.1 D11.2 R26.2 | length 4.3
  Top Layer w0.6: R26.2 65.45,67.7 65.6,67.55 D9.1
NetD13_2: D13.2 R27.2 | length 2.5
  Top Layer w0.6: R27.2 D13.2
NetD15_2: D15.2 L1.1 U4.2 | length 17.7
  Top Layer w1: L1.1@37.3,18.4 L1.1@38.2,18.4 ; L1.1@39.1,18.4 41.5,16 D15.2
  Top Layer w1.2: U4.2 34.4,21.3 L1.1@37.3,18.4
NetD16_1: D16.1 P2.3 R28.2 U1.20 U5.3 | length 57.7
  Top Layer w0.4: v4@90.3,19.2 90.3,10.03 U5.3 ; v4@90.4,25.6 91,25.6 91.4,25.2 U1.20 ; P2.3 116.5,5.6 R28.2 D16.1
  Bottom Layer w0.4: v4(90.3,25.6) 90.3,19.347 90.303,19.344 v4(90.309,19.344) ; U5.3 93.93,7.63 94.8,8.5 109.6,8.5 P2.3
NetD16_2: D16.2 D17.1 | length 2.6
  Top Layer w0.4: D17.1@127.625,3.015 D16.2
NetJ5_2: J5.2 U7.7 | length 16.1
  Top Layer w0.5: U7.7 153.825,26.675 153.2,27.3 153.2,28.8 153.57,29.17 J5.2 162.27,29.17
NetJ5_3: J5.3 U7.8 | length 9.1
  Top Layer w0.5: U7.8 160.155,27.945 161.7,26.4 J5.3
NetP1_4: P1.4 U1.17 | length 10.9
  Top Layer w0.4: P1.4 82.2,27.6 U1.17
NetP1_5: P1.5 U1.16 | length 11.4
  Top Layer w0.4: P1.5 83.7,29.9 85.2,28.4 U1.16
NetP2_2: P2.2 R29.2 U1.19 U5.2 | length 47.9
  Top Layer w0.4: v4(92.1,20.6) 92.1,10.7 93.9,8.9 97.1,8.9 ; U1.19 v4(94.7,26) ; R29.2 92.95,3.45 93.8,4.3 94.8,4.3 95.2,4.7 U5.2 ; 95.2,7.6 U5.2 ; 95.2,8.8 U5.2 ; 96.6,8.9 97.1,8.9 ; P2.2 104.2,8.9 97.1,8.9
  Bottom Layer w0.4: v4@92.1,20.7 92.1,23.4 v4(94.7,26)
NetQ1_1: Q1.1 R3.2 | length 4
  Top Layer w0.5: R3.2 162.85,47.05 163.8,46.1 Q1.1
NetQ2_1: Q2.1 R4.2 | length 4.1
  Top Layer w0.5: R4.2 152.25,47.05 153.2,46.1 Q2.1
NetQ3_1: Q3.1 R5.2 | length 4
  Top Layer w0.5: R5.2 141.65,47.05 142.7,46 Q3.1
NetQ4_1: Q4.1 R6.2 | length 4.1
  Top Layer w0.6: R6.2 131.25,47.05 132.2,46.1 Q4.1
NetQ5_4: Q5.4 U2.11 | length 15.6
  Top Layer w0.4: U2.11 37.1,51.3 v3(37.3,51.1) ; v3(47.2,53.2) Q5.4@47.2,54.47
  Bottom Layer w0.4: v3(37.3,51.1) 40.3,51.1 42.3,53.1 47.1,53.1 v3(47.2,53.2)
NetQ6_4: Q6.4 U3.11 | length 16.8
  Top Layer w0.4: U3.11 82.3,50.7 v3@82.5,50.5 ; v3@92.4,53 v3(92.4,53.1) Q6.4@92.4,54.47
  Bottom Layer w0.4: v3(82.6,50.7) 85.2,50.7 86.6,52.1 86.6,52.707 86.993,53.1 v3(92.4,53.1)
NetR1_2: R1.2 U1.22 | length 24
  Top Layer w0.4: R1.2 74.6,11.6 75.6,12.6 77.6,12.6 88.6,23.6 U1.22
NetR2_2: R2.2 U1.23 | length 21.8
  Top Layer w0.4: R2.2 88.55,22.1 U1.23
NetR3_1: R3.1 U1.40 | length 66.5
  Top Layer w0.4: U1.40 127,28.4 136.7,38.1 157.7,38.1 161.1,41.5 R3.1
NetR4_1: R4.1 U1.41 | length 54.7
  Top Layer w0.4: U1.41 126.6,29.2 136.3,38.9 146.6,38.9 150.4,42.7 R4.1
NetR5_1: R5.1 U1.42 | length 43.3
  Top Layer w0.4: U1.42 126.2,30 139.9,43.7 R5.1
NetR6_1: R6.1 U1.43 | length 37.9
  Top Layer w0.4: U1.43 125.8,30.8 129.4,34.4 R6.1
NetR9_1: R9.1 R11.2 U2.5 U2.9 | length 70.2
  Top Layer w0.4: R9.1 R11.2@86.725,37.7
  Top Layer w0.5: U2.5 31.1,55.5 31.6,56 34.6,56 35.1,55.5 U2.9 35.1,46.327 36.327,45.1 70,45.1 75.9,39.2 84.6,39.2 85.25,38.55 R9.1
NetR10_1: R10.1 R12.2 U3.5 U3.9 | length 46.3
  Top Layer w0.4: R12.2 R10.1
  Top Layer w0.5: U3.5 76.3,55.8 76.6,56.1 80,56.1 80.3,55.8 U3.9 80.3,46.827 82.627,44.5 103.2,44.5 105.2,42.5 105.2,40.6 104.65,40.05 R10.1
NetR11_1: R11.1 U1.9 | length 10.1
  Top Layer w0.4: R11.1 89.025,37.675 91.1,35.6 94.7,35.6 95.8,34.5 U1.9
NetR12_1: R12.1 U1.3 | length 5.8
  Top Layer w0.4: U1.3 100.6,34.247 101.953,35.6 103.3,35.6 103.8,36.1 R12.1
NetR13_1: R13.1 U1.11 | length 5.8
  Top Layer w0.5: R13.1 U1.11
NetR13_2: R13.2 U2.4 | length 70
  Top Layer w0.5: U2.4 30.1,47.509 35.209,42.4 68.727,42.4 78.427,32.7 86.35,32.7 R13.2
NetR14_1: R14.1 U1.5 | length 3.6
  Top Layer w0.4: U1.5 R14.1@99,36.75
NetR14_2: R14.2 U3.4 | length 34.5
  Top Layer w0.5: U3.4 75.3,48.009 81.509,41.8 95.849,41.8 98.5,39.149 98.5,38.7 98.75,38.45 R14.2
NetR15_1: R15.1 U1.8 | length 11.7
  Top Layer w0.4: R15.1 89.1,39.2 91.9,36.4 95,36.4 96.6,34.8 U1.8
NetR15_2: R15.2 U2.10 | length 61.7
  Top Layer w0.5: U2.10 36.1,46.6 36.7,46 70.4,46 76.1,40.3 85.65,40.3 R15.2
NetR16_1: R16.1 U1.2 | length 6.8
  Top Layer w0.4: U1.2 101.4,34.057 102.243,34.9 104.8,34.9 105.4,35.5 R16.1
NetR16_2: R16.2 U3.10 | length 38.7
  Top Layer w0.5: U3.10 81.3,47.1 83,45.4 103.6,45.4 106.1,42.9 106.1,40 105.4,39.3 R16.2
NetR17_1: R17.1 R19.2 U1.36 | length 6.1
  Top Layer w0.4: U1.36 R17.1@108.283,25.2 ; R17.1 R19.2
NetR17_2: R17.2 U2.7 | length 99.2
  Top Layer w0.5: U2.7 33.1,45.782 35.582,43.3 69.1,43.3 77.7,34.7 v4(78.9,34.7) ; R17.2 v4@111.533,25.267
  Bottom Layer w0.5: v4(78.9,34.7) 79.3,35.1 104.5,35.1 111.6,28 v4(111.6,25.2)
NetR18_1: R18.1 R20.2 U1.35 | length 6.5
  Top Layer w0.4: U1.35 106.7,24.4 107.367,23.733 R18.1 R20.2
NetR18_2: R18.2 U3.7 | length 57.6
  Top Layer w0.5: U3.7 78.3,46.282 81.882,42.7 98.1,42.7 98.6,42.2 v4@98.6,42.1 ; R18.2@110.083,23.7 111.6,23.7 v4(111.6,23.6)
  Bottom Layer w0.5: v4(98.7,42.1) 98.943,42.1 113.2,27.843 113.2,24.7 112.2,23.7 111.6,23.7 v4(111.6,23.6)
NetR21_1: R21.1 R23.2 U2.8 | length 65.1
  Top Layer w0.4: R23.2@85.3,36.15 R21.1
  Top Layer w0.5: U2.8 34.1,46.054 35.954,44.2 69.5,44.2 77.55,36.15 R23.2
NetR22_1: R22.1 R24.2 U3.8 | length 35.7
  Top Layer w0.4: R22.1 R24.2@102.2,40.05
  Top Layer w0.5: U3.8 79.3,46.554 82.254,43.6 99.6,43.6 102.15,41.05 R24.2
NetR30_1: R30.1 U1.21 U6.2 | length 23.7
  Top Layer w0.4: U6.2 86,8.95 R30.1@86.3,9.25 ; v4@86.3,23.4 86.4,23.4 87.4,24.4 U1.21 ; R30.1 v4@86.35,17.45
  Bottom Layer w0.4: v4(86.3,17.5) v4(86.3,23.3)
NetU1_1: U1.1 U7.9 | length 49.9
  Top Layer w0.4: U1.1 102.7,33.6 v4(126.6,33.6) ; v4(133.9,33.6) 142.4,33.6 148.05,27.95 U7.9
  Bottom Layer w0.4: v4(126.6,33.6) v4(133.9,33.6)
NetU1_44: U1.44 U7.10 | length 48.4
  Top Layer w0.4: U1.44 105.4,31.6 105.9,32.1 v4@125.2,32.1 ; v4(132.5,32.1) 142.3,32.1 147.725,26.675 U7.10
  Bottom Layer w0.4: v4(125.1,32.1) v4(132.5,32.1)
VCC: C1.2 C2.1 C3.2 C19.1 C20.2 C21.2 C22.2 C24.2 C27.1 D13.1 L1.2 P1.2 P2.1 R7.2 R9.2 R10.2 R30.2 U1.7 U1.28 U4.4 U5.1 U6.3 U7.16 | length 246.4
  Top Layer w0.4: R7.2 81.55,23.55 P1.2 ; v4(82.4,37.7) R9.2 ; R30.2 84.65,6.48 U6.3 84.73,3.12 C22.2 ; v4(95.4,39.2) 95.4,37.8 96.45,36.75 C3.2 97.4,33.1 97.4,24.8 98.2,24 U1.28 98.2,17.55 C2.1@95.75,17.55 ; U5.1 97.65,5.22 C21.2
  Top Layer w0.5: U7.16@149.35,18.88 C24.2 149.35,14.55 C27.1
  Top Layer w0.6: C19.1 76,26.5 78.6,23.9 P1.2 ; v4@102.4,42.9 102.4,42.8 103.45,41.75 R10.2 ; v4(147.4,13.8) C27.1@149.7,13.8
  Top Layer w1: L1.2@36.5,27.4 L1.2@38.2,27.4
  Top Layer w1.2: U4.4 33.8,24.7 L1.2@36.5,27.4
  Top Layer w1.3: L1.2@38.2,27.4 C19.1@51.1,27.4
  Bottom Layer w0.4: v4(82.4,37.7) 93.9,37.7 v4(95.4,39.2) 95.4,42.1 97,43.7 101.5,43.7 v4(102.3,42.9)
  Bottom Layer w0.6: v4(97.4,31.1) 91.6,31.1 84.4,23.9 P1.2 80.4,23.9 79.4,22.9 79.4,18.8 84.73,13.47 U6.3 84.73,4.17 85.9,3 95.8,3 96.3,3.5 96.3,6.23 101.87,6.23 P2.1 107.2,0.9 116.1,0.9 129,13.8 v4(147.4,13.8)
"VIN +24V": C11.2 C13.2 CN6.2 CN6.4 D1.2 D2.2 D3.2 D4.2 D12.1 D14.2 K1.3 K2.3 K3.3 K4.3 Q5.1 Q5.2 Q5.3 Q6.1 Q6.2 Q6.3 U2.12 U3.12 | length 171.5
  Top Layer w0.6: U2.12 38.1,52 39.4,50.7 43.9,50.7 ; U3.12 83.3,51.9 84.6,50.6 88.8,50.6
  Top Layer w1: D12.1 11.3,13.1 9.1,15.3 9.1,29.5 11,31.4 18,31.4 20.15,33.55 CN6.4 CN6.2 19.8,41.65 D14.2 ; 98.2,52.1 D4.2 129.1,54 K4.3 130.28,58.2 157.6,58.2 159.19,56.61 K1.3 160.7,54 D1.2 ; 138.123,58.077 K3.3 139.6,54.033 D3.2 ; 148.657,58.157 K2.3 150.2,53.967 D2.2
  Bottom Layer w1: 18,37.1 CN6.4 ; 18,41.3 CN6.2 ; 20.15,35.35 CN6.4 ; 20.15,43.95 CN6.2 ; 22.7,37.1 CN6.4 ; 22.9,41.3 CN6.2 ; CN6.4 CN6.2
  other v3: 88.9,48.5 90.383,48.5 91.867,48.5 93.35,48.5 94.833,48.5 96.317,48.5 97.8,48.5 43.7,48.8 45.183,48.8 46.667,48.8 48.15,48.8 49.633,48.8 51.117,48.8 52.6,48.8 88.9,49.8 90.383,49.8 91.867,49.8 93.35,49.8 94.833,49.8 96.317,49.8 97.8,49.8 43.7,50.1 45.183,50.1 46.667,50.1 48.15,50.1 49.633,50.1 51.117,50.1 52.6,50.1 88.9,51.1 90.383,51.1 91.867,51.1 93.35,51.1 94.833,51.1 96.317,51.1 97.8,51.1 43.7,51.4 45.183,51.4 46.667,51.4 48.15,51.4 49.633,51.4 51.117,51.4 52.6,51.4
VOUT: C7.1 C8.1 C9.1 C10.1 C12.2 C14.2 D7.1 Q5.5@45.3,58.43 Q6.5@90.5,58.43 U2.2 U2.3 U2.13 U2.14 U2.23 U2.31 U3.2 U3.3 U3.13 U3.14 U3.23 U3.31 | length 130.5
  Top Layer w0.6: U2.31 U2.23 ; U2.13@39.1,54.65 39.1,52.5 40.1,52.5 U2.14@40.1,54.65 ; Q5.5@46.37,59.4 C8.1@51.4,59.4 ; C12.2 C7.1@51.25,66.95 ; D7.1 v4(60,72.9) ; U3.31 U3.23 ; Q6.5@91.47,59.4 C9.1 C10.1 ; C14.2 C9.1@96.55,59.35 ; 28.1,52.4 U2.2 28.1,52.4 ; 28.1,52.4 29.1,52.4 ; 28.1,52.4 29.1,52.4 ; 29.1,52.4 U2.3 29.1,52.4 ; 73.3,52.5 74.3,52.5 ; 73.3,52.5 73.3,54.65 73.3,52.5 ; 73.3,52.5 74.3,52.5 ; 74.3,52.5 74.3,54.65 74.3,52.5 ; 84.3,52.5 85.3,52.5 ; 84.3,52.5 85.3,52.5 ; 84.3,52.5 85.3,52.5 ; 84.3,52.5 U3.13@84.3,54.65 ; 84.3,52.5 U3.13@84.3,54.65 ; 84.3,52.5 U3.13@84.3,54.65 ; 85.3,52.5 U3.14@85.3,54.65 ; 85.3,52.5 U3.14@85.3,54.65 ; 85.3,52.5 U3.14@85.3,54.65
  Bottom Layer w0.6: 28.1,54.4 28.1,52.4 29.1,52.4 29.1,54.4 ; v4@28.6,52.8 28.6,54.5 ; 39.1,54.5 39.1,52.5 40.1,52.5 40.1,55.8 ; v4(39.6,52.9) 39.6,54.6 ; 73.3,54.5 73.3,52.5 74.3,52.5 74.3,54.4 ; v4(73.8,52.9) 73.8,54.6 ; 84.3,54.5 84.3,52.5 85.3,52.5 85.3,54.3 ; v4(84.8,52.9) 84.8,54.3 84.8,54.6
  other v1: 89.033,57 90.517,57 92,57 43.833,57.1 45.317,57.1 46.8,57.1 89.033,58.3 90.517,58.3 92,58.3 43.833,58.4 45.317,58.4 46.8,58.4 29.7,58.7 31.183,58.7 32.667,58.7 34.15,58.7 35.633,58.7 37.117,58.7 38.6,58.7 74.8,58.7 76.283,58.7 77.767,58.7 79.25,58.7 80.733,58.7 82.217,58.7 83.7,58.7 89.033,59.6 90.517,59.6 92,59.6 43.833,59.7 45.317,59.7 46.8,59.7 29.7,60 31.183,60 32.667,60 34.15,60 35.633,60 37.117,60 38.6,60 74.8,60 76.283,60 77.767,60 79.25,60 80.733,60 82.217,60 83.7,60 29.7,61.3 31.183,61.3 32.667,61.3 34.15,61.3 35.633,61.3 37.117,61.3 38.6,61.3 74.8,61.3 76.283,61.3 77.767,61.3 79.25,61.3 80.733,61.3 82.217,61.3 83.7,61.3 29.7,62.6 31.183,62.6 32.667,62.6 34.15,62.6 35.633,62.6 37.117,62.6 38.6,62.6 74.8,62.6 76.283,62.6 77.767,62.6 79.25,62.6 80.733,62.6 82.217,62.6 83.7,62.6
  other v3: 48.7,54.5 93.9,54.7 48.7,55.8 93.9,56 48.7,57.1 93.9,57.3 48.7,58.4 93.9,58.6 48.7,59.7 93.9,59.9 48.7,61 93.9,61.2 48.7,62.3 93.9,62.5 48.7,63.6 93.9,63.8 48.7,64.9 93.9,65.1 48.7,66.2 93.9,66.4 48.7,67.5 93.9,67.7
  other v4: 28.6,52.9
pads on no net: J5.1 J5.4 J5.6 J5.7 J5.8 J5.9 J5.10 J5.11 Q5.5@44.15,56.775 Q5.5@44.15,57.625 Q5.5@44.15,58.475 Q5.5@44.15,59.325 Q5.5@45.3,56.775 Q5.5@45.3,57.625 Q5.5@45.3,58.475 Q5.5@45.3,59.325 Q5.5@46.45,56.775 Q5.5@46.45,57.625 Q5.5@46.45,58.475 Q5.5@46.45,59.325 Q5.5@47.205,60.325 Q5.6 Q5.7 Q5.8 Q6.5@89.35,56.775 Q6.5@89.35,57.625 Q6.5@89.35,58.475 Q6.5@89.35,59.325 Q6.5@90.5,56.775 Q6.5@90.5,57.625 Q6.5@90.5,58.475 Q6.5@90.5,59.325 Q6.5@91.65,56.775 Q6.5@91.65,57.625 Q6.5@91.65,58.475 Q6.5@91.65,59.325 Q6.5@92.405,60.325 Q6.6 Q6.7 Q6.8 U1.12 U1.13 U1.14 U1.15 U1.24 U1.25 U1.26 U1.27 U1.30 U1.33 U1.34 U1.37 U1.38 U1.39 U2.6 U3.6 U7.11 U7.12 U7.13 U7.14

## Polygon pours and split planes (outlines as drawn)
"VIN +24V" on Top Layer "Top Layer-No Net" (solid, pour order 1000): 42.5,55.2 42.5,47.8 53.6,47.8 53.6,53.2 53.5,53.3 46.4,53.3 46.3,53.4 46.3,55.2
"VIN +24V" on Top Layer "Top Layer-No Net" (solid, pour order 1001): 87.7,55.318 87.7,47.918 98.8,47.918 98.8,53.318 98.7,53.418 91.6,53.418 91.5,53.518 91.5,55.318
GND on Top Layer "Top Layer-No Net" (solid, pour order 1002): 0,100 175,100 175,0 0,0
VOUT on Bottom Layer "Top Layer-No Net" (solid, pour order 1000): 12.4,75.8 12.4,54 101,54 101,75.8 93,71 91.7,63.5 67,63.5 66.3,67.1 65.6,70.8 56.7,75.8 55.8,75.8 48,71 47.2,67 46.6,63.5 21.8,63.5 21.7,64 20.3,70.8
NetCN3_2 on Bottom Layer "Top Layer-No Net" (solid, pour order 1000): 78.9,64 78.9,100 56.7,100 56.7,76.5 57.5,76.1 66.1,71.3 67.5,64
NetCN3_1 on Bottom Layer "Top Layer-No Net" (solid, pour order 1000): 79.7,64 79.7,100 101,100 101,76.5 92.5,71.3 91.1,64
NetCN1_1 on Bottom Layer "Top Layer-No Net" (solid, pour order 1000): 34.5,64 34.5,100 55.8,100 55.8,76.5 47.3,71.3 45.9,64
NetCN1_2 on Bottom Layer "Top Layer-No Net" (solid, pour order 1000): 33.7,64 33.7,100 12.4,100 12.4,76.5 20.9,71.3 22.4,64
"VIN +24V" on Bottom Layer "Top Layer-No Net" (solid, pour order 1003): 17.3,34.7 17.3,52.5 99.8,52.5 99.8,44.9 91.8,44.9 89,40 26.4,40 26.4,34.7
GND on Bottom Layer "Top Layer-No Net" (solid, pour order 1004): 0,100 0,0 175,0 175,100

## Keep-outs
Keep-Out Layer:
  the board outline again, w0.3

## Other copper
Top Layer:
  rectangle net "VIN +24V": 42.5,53.4 46.3,55
  rectangle net "VIN +24V": 87.7,52.9 91.5,54.9
  rectangle net "VIN +24V": 87.9,47.9 98.7,52
  rectangle net GND: 27.8,72.2 31.4,74.8
  rectangle net GND: 36.8,72.2 40.4,74.8
  rectangle net GND: 73,72.2 76.6,74.6
  rectangle net GND: 82,72.2 85.6,74.6
  rectangle net "VIN +24V": 42.8,47.9 53.5,52.3
  pour cut-out: 26.4,72.9 41.8,72.9 41.9,73 41.9,55.3 26.4,55.3
  pour cut-out: 71.5,72.8 86.9,72.8 87,72.9 87,55.2 71.5,55.2
Bottom Layer:
  rectangle net NetCN1_1: 34.7,73 43,76
  rectangle net VOUT: 73.4,57.7 84.8,63.5
  rectangle net VOUT: 28.5,57.7 39.8,63.5
  rectangle net NetCN3_1: 79.9,73 88.2,76
  rectangle net NetCN3_2: 70.1,72.8 78.8,75.8
  rectangle net NetCN3_1: 80,64 87.8,70.1
  rectangle net NetCN3_2: 70.7,64 78.5,70.1
  rectangle net NetCN1_1: 34.6,72.7 42.8,76.1
  rectangle net NetCN1_2: 24.8,73.2 33.6,75.7
  rectangle net NetCN1_2: 25.4,64 33.2,70.1
  rectangle net NetCN1_1: 34.6,64 42.4,70.1
  rectangle net VOUT: 88,55.2 93,60.8
  rectangle net VOUT: 92.9,54 95,68.7
  rectangle net VOUT: 47.8,54 49.6,69.7
  rectangle net VOUT: 42.5,56.1 47.7,61.2
  rectangle net "VIN +24V": 17.9,35.1 23.1,44.6
  rectangle net "VIN +24V": 87.3,46.5 99.5,51.9
  rectangle net "VIN +24V": 42.6,47.9 53.6,52.1
  rectangle net "VIN +24V": 42.9,51.6 46.6,52.4
  rectangle net "VIN +24V": 47.9,51.8 53.4,52.4
  rectangle net "VIN +24V": 46.3,52 47.9,52.3

## Silkscreen, mask and mechanical layers (free items; w line width, h text height)
Top Overlay:
  drawing of 6 lines, arcs and shapes, not listed

## Text inside footprints (layer, text, board x,y; h text height)
C17: Top Overlay "+" at 24.56,2.395 h2.5 r90
C19: Top Overlay "+" at 45.195,26.24 h2.5
J5: Top Overlay "6" at 169.725,31.055 h1.5 r270; Top Overlay "9" at 169.725,22.745 h1.5 r270; Top Overlay "5" at 160.325,21.36 h1.5 r270; Top Overlay "1" at 160.325,32.19 h1.5 r270